# EAGLE board stress_test1 (EAGLE 6.2)
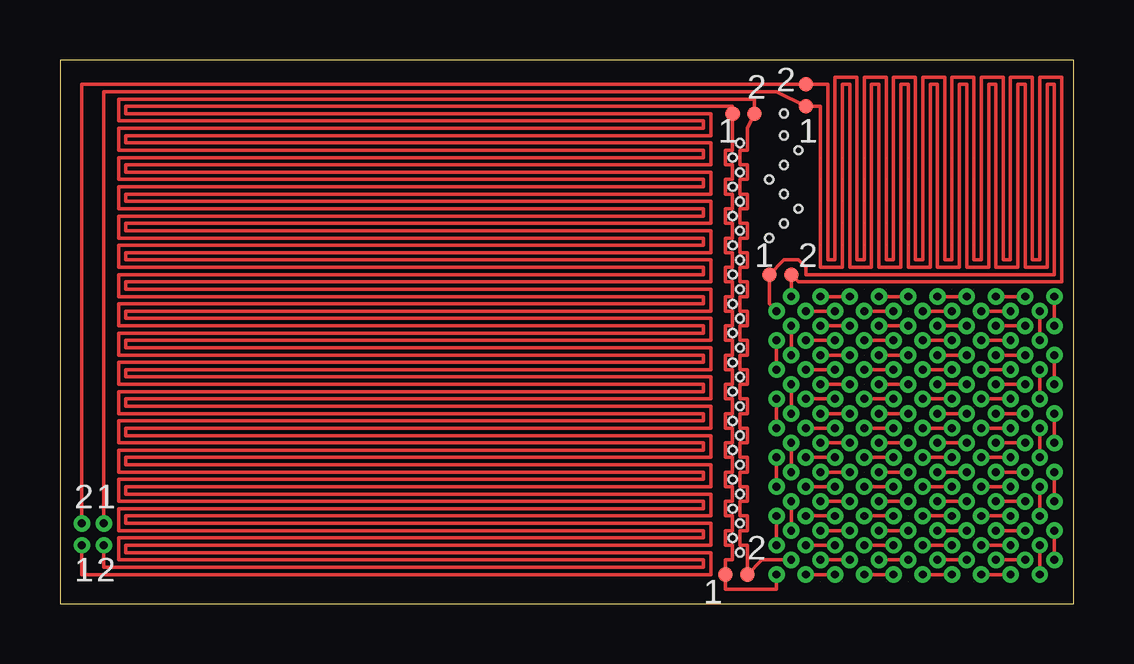
[diagram p0: board, top side]
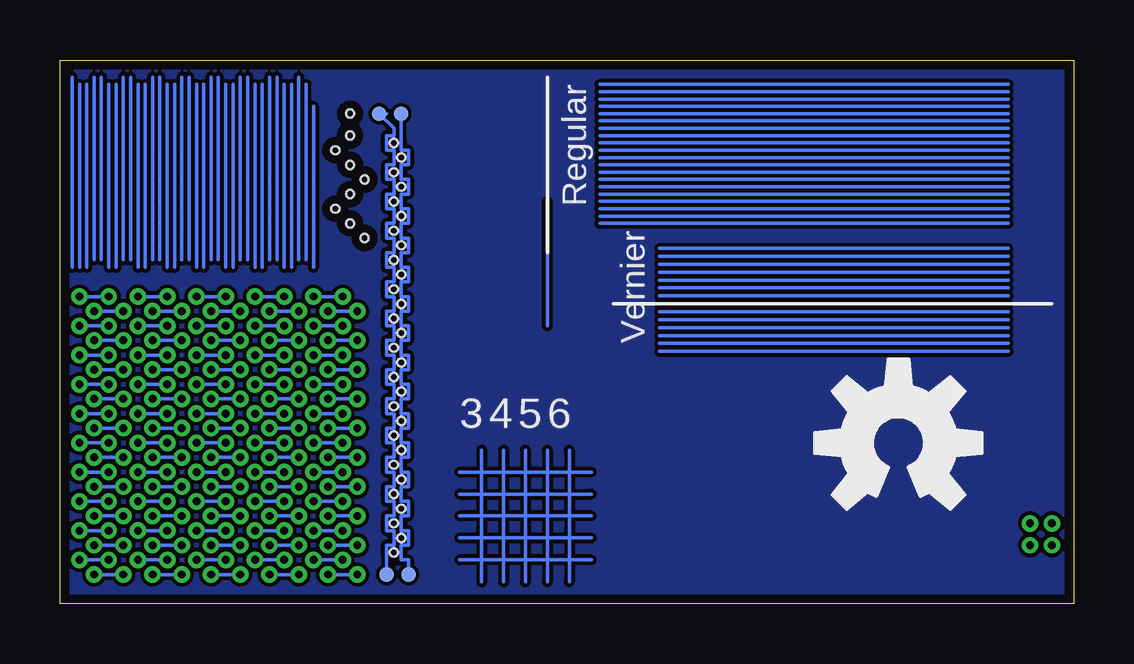
[diagram p1: board, bottom side, seen from below]

Size 42.27 x 22.66 mm. Coordinates in mm from the lower left corner, seen from the top.
Outline: 0,0 42.27,0 42.27,22.66 0,22.66 0,0
Copper layers (1*16): Top 0.0356mm / dielectric 1.5011mm / Bottom 0.0356mm
Design rules: minimum track width 6mil, minimum drill 13mil, track to track 6mil, track to pad 6mil, pad to pad 6mil, via to via 6mil, smd to smd 6mil, copper to edge 15mil, drill to drill 6mil, minimum pad ring 7mil, minimum via ring 7mil, stop-mask expansion 4mil, vias tented up to drill 0mil, thermal gap 10mil
Holes 0.33 mm at 28.04,13.72 28.35,14.33 28.04,14.94 28.35,15.54 28.04,16.15 28.35,16.76 28.04,17.37 28.35,17.98 28.04,18.59 28.35,19.2 28.04,7.62 28.35,8.23 28.04,8.84 28.35,9.45 28.04,10.06 28.35,10.67 28.04,11.28 28.35,11.89 28.04,12.5 28.35,13.11 28.35,2.13 28.04,2.74 28.35,3.35 28.04,3.96 28.35,4.57 28.04,5.18 28.35,5.79 28.04,6.4 28.35,7.01 30.18,20.42 30.18,19.51 30.78,18.9 30.18,18.29 29.57,17.68 30.18,17.07 30.78,16.46 30.18,15.85 29.57,15.24

## Footprints (pad centres in the part's own frame; a part is rotated, then mirrored left to right if it is on the bottom)
TP06R = smd 0.6 x 0.6: TP 0,0

## Placement (x,y rotation side)
E$1  [TP06R]  28.04,20.42 0 top
E$2  [TP06R]  28.96,20.42 0 top
E$3  [TP06R]  27.74,1.22 0 top
E$4  [TP06R]  28.65,1.22 0 top
E$5  [TP06R]  31.09,20.73 0 top
E$6  [TP06R]  31.09,21.64 0 top
E$7  [TP06R]  29.57,13.72 0 top
E$8  [TP06R]  30.48,13.72 0 top
E$11  [TP06R]  0.91,3.35 0 top
E$12  [TP06R]  1.83,3.35 0 top
E$13  [TP06R]  1.83,2.44 0 top
E$14  [TP06R]  0.91,2.44 0 top
E$15  [TP06R]  28.04,20.42 0 bottom
E$16  [TP06R]  28.96,20.42 0 bottom
E$17  [TP06R]  27.74,1.22 0 bottom
E$18  [TP06R]  28.65,1.22 0 bottom
E$19  [OSHW-LOGO-L]  7.32,6.71 0 bottom

## Library data of the parts
E$1-E$8 E$11-E$18 = testpad
E$19 = SparkFun-Aesthetics

## Nets
S$1: E$1.TP E$5.TP E$7.TP
S$2: E$2.TP E$4.TP E$6.TP E$8.TP
S$263: E$15.TP E$17.TP
S$265: E$16.TP E$18.TP

## Tracks (layer width: path | path; a pad name or v marks a point on that pad's centre or on a via)
S$1  (via drill 0.33)
  Top 0.152: v0.91,2.44 0.91,1.22 27.13,1.22 27.13,2.13 2.74,2.13 2.74,2.44 27.13,2.44 27.13,3.35 2.74,3.35 2.74,3.66 27.13,3.66 27.13,4.57 2.74,4.57 2.74,4.88 27.13,4.88 27.13,5.79 2.74,5.79 2.74,6.1 27.13,6.1 27.13,7.01 2.74,7.01 2.74,7.31 27.13,7.31 27.13,8.23 2.74,8.23 2.74,8.53 27.13,8.53 27.13,9.45 2.74,9.45 2.74,9.75 27.13,9.75 27.13,10.67 2.74,10.67 2.74,10.97 27.13,10.97 27.13,11.89 2.74,11.89 2.74,12.19 27.13,12.19 27.13,13.11 2.74,13.11 2.74,13.41 27.13,13.41 27.13,14.33 2.74,14.33 2.74,14.63 27.13,14.63 27.13,15.54 2.74,15.54 2.74,15.85 27.13,15.85 27.13,16.76 2.74,16.76 2.74,17.07 27.13,17.07 27.13,17.98 2.74,17.98 2.74,18.29 27.13,18.29 27.13,19.2 2.74,19.2 2.74,19.51 27.13,19.51 27.13,20.42 2.74,20.42 2.74,20.73 28.04,20.73 E$1.TP 28.04,18.9 27.74,18.9 27.74,18.29 28.04,18.29 28.04,17.68 27.74,17.68 27.74,17.07 28.04,17.07 28.04,16.46 27.74,16.46 27.74,15.85 28.04,15.85 28.04,15.24 27.74,15.24 27.74,14.63 28.04,14.63 28.04,14.02 27.74,14.02 27.74,13.41 28.04,13.41 28.04,12.8 27.74,12.8 27.74,12.19 28.04,12.19 28.04,11.58 27.74,11.58 27.74,10.97 28.04,10.97 28.04,10.36 27.74,10.36 27.74,9.75 28.04,9.75 28.04,9.14 27.74,9.14 27.74,8.53 28.04,8.53 28.04,7.92 27.74,7.92 27.74,7.31 28.04,7.31 28.04,6.71 27.74,6.71 27.74,6.1 28.04,6.1 28.04,5.49 27.74,5.49 27.74,4.88 28.04,4.88 28.04,4.27 27.74,4.27 27.74,3.66 28.04,3.66 28.04,3.05 27.74,3.05 27.74,2.44 28.04,2.44 28.04,1.83 27.74,1.83 27.74,0.61 29.87,0.61 v29.87,1.22 | v31.09,1.22 v32.31,1.22 | v33.53,1.22 v34.75,1.22 | v35.97,1.22 v37.19,1.22
  Top 0.152: v38.4,1.22 v39.62,1.22 | v31.09,2.44 v32.31,2.44 | v33.53,2.44 v34.75,2.44 | v35.97,2.44 v37.19,2.44 | v38.4,2.44 v39.62,2.44 | v40.84,1.22 v40.84,2.44 | v31.09,3.66 v32.31,3.66 | v33.53,3.66 v34.75,3.66 | v35.97,3.66 v37.19,3.66 | v38.4,3.66 v39.62,3.66 | v29.87,2.44 v29.87,3.66 | v31.09,4.88 v32.31,4.88 | v33.53,4.88 v34.75,4.88 | v35.97,4.88 v37.19,4.88 | v38.4,4.88 v39.62,4.88 | v40.84,3.66 v40.84,4.88 | v31.09,6.1 v32.31,6.1 | v33.53,6.1 v34.75,6.1 | v35.97,6.1 v37.19,6.1 | v38.4,6.1 v39.62,6.1 | v31.09,7.31 v32.31,7.31 | v33.53,7.31 v34.75,7.31 | v35.97,7.31 v37.19,7.31 | v38.4,7.31 v39.62,7.31 | v40.84,6.1 v40.84,7.31 | v29.87,4.88 v29.87,6.1 | v31.09,8.53 v32.31,8.53 | v33.53,8.53 v34.75,8.53 | v35.97,8.53 v37.19,8.53 | v38.4,8.53 v39.62,8.53 | v31.09,9.75 v32.31,9.75 | v33.53,9.75 v34.75,9.75 | v35.97,9.75 v37.19,9.75 | v38.4,9.75 v39.62,9.75 | v40.84,8.53 v40.84,9.75 | v29.87,7.31 v29.87,8.53 | v31.09,10.97 v32.31,10.97 | v33.53,10.97 v34.75,10.97 | v35.97,10.97 v37.19,10.97 | v38.4,10.97 v39.62,10.97 | v31.09,12.19 v32.31,12.19 | v33.53,12.19 v34.75,12.19 | v35.97,12.19 v37.19,12.19 | v38.4,12.19 v39.62,12.19 | v40.84,10.97 v40.84,12.19 | v29.87,9.75 v29.87,10.97 | v29.87,12.19 29.57,12.5 E$7.TP 30.17,14.33 30.78,14.33 31.09,14.02 31.09,13.72 41.45,13.72 41.45,21.64 41.15,21.64 41.15,14.02 40.23,14.02 40.23,21.64 39.93,21.64 39.93,14.02 39.01,14.02 39.01,21.64 38.71,21.64 38.71,14.02 37.79,14.02 37.79,21.64 37.49,21.64 37.49,14.02 36.58,14.02 36.58,21.64 36.27,21.64 36.27,14.02 35.36,14.02 35.36,21.64 35.05,21.64 35.05,14.02 34.14,14.02 34.14,21.64 33.83,21.64 33.83,14.02 32.92,14.02 32.92,21.64 32.61,21.64 32.61,14.02 31.7,14.02 31.7,20.73 E$5.TP 29.87,21.34 1.83,21.34 v1.83,3.35
  Bottom 0.152: v29.87,1.22 v31.09,1.22 | v32.31,1.22 v33.53,1.22 | v34.75,1.22 v35.97,1.22 | v37.19,1.22 v38.4,1.22 | v39.62,1.22 v40.84,1.22 | v29.87,2.44 v31.09,2.44 | v32.31,2.44 v33.53,2.44 | v34.75,2.44 v35.97,2.44 | v37.19,2.44 v38.4,2.44 | v39.62,2.44 v40.84,2.44 | v29.87,3.66 v31.09,3.66 | v32.31,3.66 v33.53,3.66 | v34.75,3.66 v35.97,3.66 | v37.19,3.66 v38.4,3.66 | v39.62,3.66 v40.84,3.66 | v29.87,4.88 v31.09,4.88 | v32.31,4.88 v33.53,4.88 | v34.75,4.88 v35.97,4.88 | v37.19,4.88 v38.4,4.88 | v39.62,4.88 v40.84,4.88 | v29.87,6.1 v31.09,6.1 | v32.31,6.1 v33.53,6.1 | v34.75,6.1 v35.97,6.1 | v37.19,6.1 v38.4,6.1 | v39.62,6.1 v40.84,6.1 | v29.87,7.31 v31.09,7.31 | v32.31,7.31 v33.53,7.31 | v34.75,7.31 v35.97,7.31 | v37.19,7.31 v38.4,7.31 | v39.62,7.31 v40.84,7.31 | v29.87,8.53 v31.09,8.53 | v32.31,8.53 v33.53,8.53 | v34.75,8.53 v35.97,8.53 | v37.19,8.53 v38.4,8.53 | v39.62,8.53 v40.84,8.53 | v29.87,9.75 v31.09,9.75 | v32.31,9.75 v33.53,9.75 | v34.75,9.75 v35.97,9.75 | v37.19,9.75 v38.4,9.75 | v39.62,9.75 v40.84,9.75 | v29.87,10.97 v31.09,10.97 | v32.31,10.97 v33.53,10.97 | v34.75,10.97 v35.97,10.97 | v37.19,10.97 v38.4,10.97 | v39.62,10.97 v40.84,10.97 | v29.87,12.19 v31.09,12.19 | v32.31,12.19 v33.53,12.19 | v34.75,12.19 v35.97,12.19 | v37.19,12.19 v38.4,12.19 | v39.62,12.19 v40.84,12.19
S$2  (via drill 0.33)
  Top 0.152: v1.83,2.44 1.83,1.52 26.82,1.52 26.82,1.83 2.44,1.83 2.44,2.74 26.82,2.74 26.82,3.05 2.44,3.05 2.44,3.96 26.82,3.96 26.82,4.27 2.44,4.27 2.44,5.18 26.82,5.18 26.82,5.49 2.44,5.49 2.44,6.4 26.82,6.4 26.82,6.71 2.44,6.71 2.44,7.62 26.82,7.62 26.82,7.92 2.44,7.92 2.44,8.84 26.82,8.84 26.82,9.14 2.44,9.14 2.44,10.06 26.82,10.06 26.82,10.36 2.44,10.36 2.44,11.28 26.82,11.28 26.82,11.58 2.44,11.58 2.44,12.5 26.82,12.5 26.82,12.8 2.44,12.8 2.44,13.72 26.82,13.72 26.82,14.02 2.44,14.02 2.44,14.93 26.82,14.93 26.82,15.24 2.44,15.24 2.44,16.15 26.82,16.15 26.82,16.46 2.44,16.46 2.44,17.37 26.82,17.37 26.82,17.68 2.44,17.68 2.44,18.59 26.82,18.59 26.82,18.9 2.44,18.9 2.44,19.81 26.82,19.81 26.82,20.12 2.44,20.12 2.44,21.03 28.96,21.03 E$2.TP 28.65,19.81 28.65,18.9 28.35,18.9 28.35,18.29 28.65,18.29 28.65,17.68 28.35,17.68 28.35,17.07 28.65,17.07 28.65,16.46 28.35,16.46 28.35,15.85 28.65,15.85 28.65,15.24 28.35,15.24 28.35,14.63 28.65,14.63 28.65,14.02 28.35,14.02 28.35,13.41 28.65,13.41 28.65,12.8 28.35,12.8 28.35,12.19 28.65,12.19 28.65,11.58 28.35,11.58 28.35,10.97 28.65,10.97 28.65,10.36 28.35,10.36 28.35,9.75 28.65,9.75 28.65,9.14 28.35,9.14 28.35,8.53 28.65,8.53 28.65,7.92 28.35,7.92 28.35,7.31 28.65,7.31 28.65,6.71 28.35,6.71 28.35,6.1 28.65,6.1 28.65,5.49 28.35,5.49 28.35,4.88 28.65,4.88 28.65,4.27 28.35,4.27 28.35,3.66 28.65,3.66 28.65,3.05 28.35,3.05 28.35,2.44 28.65,2.44 E$4.TP 29.26,1.83 v30.48,1.83 | v31.7,1.83 v32.92,1.83 | v34.14,1.83 v35.36,1.83 | v36.58,1.83 v37.79,1.83 | v39.01,1.83 v40.23,1.83
  Top 0.152: v31.7,3.05 v32.92,3.05 | v34.14,3.05 v35.36,3.05 | v36.58,3.05 v37.79,3.05 | v39.01,3.05 v40.23,3.05 | v41.45,1.83 v41.45,3.05 | v31.7,4.27 v32.92,4.27 | v34.14,4.27 v35.36,4.27 | v36.58,4.27 v37.79,4.27 | v39.01,4.27 v40.23,4.27 | v30.48,3.05 v30.48,4.27 | v31.7,5.49 v32.92,5.49 | v34.14,5.49 v35.36,5.49 | v36.58,5.49 v37.79,5.49 | v39.01,5.49 v40.23,5.49 | v31.7,6.71 v32.92,6.71 | v34.14,6.71 v35.36,6.71 | v36.58,6.71 v37.79,6.71 | v39.01,6.71 v40.23,6.71 | v30.48,5.49 v30.48,6.71 | v41.45,4.27 v41.45,5.49 | v31.7,7.92 v32.92,7.92 | v34.14,7.92 v35.36,7.92 | v36.58,7.92 v37.79,7.92 | v39.01,7.92 v40.23,7.92 | v31.7,9.14 v32.92,9.14 | v34.14,9.14 v35.36,9.14 | v36.58,9.14 v37.79,9.14 | v39.01,9.14 v40.23,9.14 | v30.48,7.92 v30.48,9.14 | v41.45,6.71 v41.45,7.92 | v31.7,10.36 v32.92,10.36 | v34.14,10.36 v35.36,10.36 | v36.58,10.36 v37.79,10.36 | v39.01,10.36 v40.23,10.36 | v31.7,11.58 v32.92,11.58 | v34.14,11.58 v35.36,11.58 | v36.58,11.58 v37.79,11.58 | v39.01,11.58 v40.23,11.58 | v30.48,10.36 v30.48,11.58 | v41.45,9.14 v41.45,10.36 | v31.7,12.8 v32.92,12.8 | v34.14,12.8 v35.36,12.8 | v36.58,12.8 v37.79,12.8 | v39.01,12.8 v40.23,12.8 | v41.45,11.58 v41.45,12.8 | v30.48,12.8 E$8.TP 30.78,13.41 41.76,13.41 41.76,21.95 40.84,21.95 40.84,14.33 40.54,14.33 40.54,21.95 39.62,21.95 39.62,14.33 39.32,14.33 39.32,21.95 38.4,21.95 38.4,14.33 38.1,14.33 38.1,21.95 37.19,21.95 37.19,14.33 36.88,14.33 36.88,21.95 35.97,21.95 35.97,14.33 35.66,14.33 35.66,21.95 34.75,21.95 34.75,14.33 34.44,14.33 34.44,21.95 33.53,21.95 33.53,14.33 33.22,14.33 33.22,21.95 32.31,21.95 32.31,14.33 32,14.33 32,21.64 E$6.TP 0.91,21.64 v0.91,3.35
  Bottom 0.152: v30.48,1.83 v31.7,1.83 | v32.92,1.83 v34.14,1.83 | v35.36,1.83 v36.58,1.83 | v37.79,1.83 v39.01,1.83 | v40.23,1.83 v41.45,1.83 | v30.48,3.05 v31.7,3.05 | v32.92,3.05 v34.14,3.05 | v35.36,3.05 v36.58,3.05 | v37.79,3.05 v39.01,3.05 | v40.23,3.05 v41.45,3.05 | v30.48,4.27 v31.7,4.27 | v32.92,4.27 v34.14,4.27 | v35.36,4.27 v36.58,4.27 | v37.79,4.27 v39.01,4.27 | v40.23,4.27 v41.45,4.27 | v30.48,5.49 v31.7,5.49 | v32.92,5.49 v34.14,5.49 | v35.36,5.49 v36.58,5.49 | v37.79,5.49 v39.01,5.49 | v40.23,5.49 v41.45,5.49 | v30.48,6.71 v31.7,6.71 | v32.92,6.71 v34.14,6.71 | v35.36,6.71 v36.58,6.71 | v37.79,6.71 v39.01,6.71 | v40.23,6.71 v41.45,6.71 | v30.48,7.92 v31.7,7.92 | v32.92,7.92 v34.14,7.92 | v35.36,7.92 v36.58,7.92 | v37.79,7.92 v39.01,7.92 | v40.23,7.92 v41.45,7.92 | v30.48,9.14 v31.7,9.14 | v32.92,9.14 v34.14,9.14 | v35.36,9.14 v36.58,9.14 | v37.79,9.14 v39.01,9.14 | v40.23,9.14 v41.45,9.14 | v30.48,10.36 v31.7,10.36 | v32.92,10.36 v34.14,10.36 | v35.36,10.36 v36.58,10.36 | v37.79,10.36 v39.01,10.36 | v40.23,10.36 v41.45,10.36 | v30.48,11.58 v31.7,11.58 | v32.92,11.58 v34.14,11.58 | v35.36,11.58 v36.58,11.58 | v37.79,11.58 v39.01,11.58 | v40.23,11.58 v41.45,11.58 | v30.48,12.8 v31.7,12.8 | v32.92,12.8 v34.14,12.8 | v35.36,12.8 v36.58,12.8 | v37.79,12.8 v39.01,12.8 | v40.23,12.8 v41.45,12.8
S$30
  Bottom 0.152: 41.76,14.02 41.76,21.95
S$36
  Bottom 0.152: 41.45,21.64 41.45,14.02
S$37
  Bottom 0.152: 41.15,14.02 41.15,21.64
S$38
  Bottom 0.152: 40.84,21.95 40.84,14.33
S$39
  Bottom 0.152: 40.54,14.33 40.54,21.95
S$40
  Bottom 0.152: 40.23,21.64 40.23,14.02
S$41
  Bottom 0.152: 39.93,14.02 39.93,21.64
S$42
  Bottom 0.152: 39.62,21.95 39.62,14.33
S$43
  Bottom 0.152: 39.32,14.33 39.32,21.95
S$44
  Bottom 0.152: 38.4,21.95 38.4,14.33
S$45
  Bottom 0.152: 38.71,14.02 38.71,21.64
S$46
  Bottom 0.152: 39.01,21.64 39.01,14.02
S$47
  Bottom 0.152: 38.1,14.33 38.1,21.95
S$48
  Bottom 0.152: 37.79,21.64 37.79,14.02
S$49
  Bottom 0.152: 37.49,14.02 37.49,21.64
S$50
  Bottom 0.152: 37.19,21.95 37.19,14.33
S$51
  Bottom 0.152: 36.88,14.33 36.88,21.95
S$52
  Bottom 0.152: 36.58,21.64 36.58,14.02
S$53
  Bottom 0.152: 36.27,14.02 36.27,21.64
S$54
  Bottom 0.152: 35.97,21.95 35.97,14.33
S$55
  Bottom 0.152: 35.66,14.33 35.66,21.95
S$56
  Bottom 0.152: 35.36,21.64 35.36,14.02
S$57
  Bottom 0.152: 35.05,14.02 35.05,21.64
S$58
  Bottom 0.152: 34.75,21.95 34.75,14.33
S$59
  Bottom 0.152: 34.44,14.33 34.44,21.95
S$60
  Bottom 0.152: 34.14,21.64 34.14,14.02
S$61
  Bottom 0.152: 33.83,14.02 33.83,21.64
S$62
  Bottom 0.152: 33.53,21.95 33.53,14.33
S$63
  Bottom 0.152: 33.22,14.33 33.22,21.95
S$64
  Bottom 0.152: 32.92,21.64 32.92,14.02
S$65
  Bottom 0.152: 32.61,14.02 32.61,21.64
S$66
  Bottom 0.152: 32.31,21.95 32.31,14.33
S$67
  Bottom 0.152: 32,14.33 32,21.64
S$68
  Bottom 0.152: 31.7,20.73 31.7,14.02
S$134
  Bottom 0.152: 21.95,11.58 21.95,16.76
S$135  (1 unrouted)
S$136  (1 unrouted)
S$137  (1 unrouted)
S$138  (1 unrouted)
S$139  (1 unrouted)
S$140  (1 unrouted)
S$141  (1 unrouted)
S$142  (1 unrouted)
S$143  (1 unrouted)
S$144  (1 unrouted)
S$145  (1 unrouted)
S$146  (1 unrouted)
S$147  (1 unrouted)
S$148  (1 unrouted)
S$149  (1 unrouted)
S$150  (1 unrouted)
S$151  (1 unrouted)
S$152  (1 unrouted)
S$153
  Bottom 0.152: 21.03,6.4 21.03,0.91
S$154  (1 unrouted)
S$234
  Bottom 0.152: 21.95,6.4 21.95,0.91
S$235  (1 unrouted)
S$236  (1 unrouted)
S$237  (1 unrouted)
S$238  (1 unrouted)
S$239  (1 unrouted)
S$240  (1 unrouted)
S$241  (1 unrouted)
S$242  (1 unrouted)
S$243  (1 unrouted)
S$244  (1 unrouted)
S$245  (1 unrouted)
S$246  (1 unrouted)
S$247  (1 unrouted)
S$248  (1 unrouted)
S$249  (1 unrouted)
S$250  (1 unrouted)
S$251  (1 unrouted)
S$252
  Bottom 0.152: 22.86,6.4 22.86,0.91
S$253  (1 unrouted)
S$254
  Bottom 0.152: 23.77,6.4 23.77,0.91
S$255
  Bottom 0.152: 24.69,6.4 24.69,0.91
S$256
  Bottom 0.152: 20.12,5.49 25.6,5.49
S$257
  Bottom 0.152: 25.6,4.57 20.12,4.57
S$258
  Bottom 0.152: 20.12,3.66 25.6,3.66
S$259
  Bottom 0.152: 25.6,2.74 20.12,2.74
S$260
  Bottom 0.152: 20.12,1.83 25.6,1.83
S$261
  Bottom 0.152: 2.74,21.64 19.76,21.64
S$262
  Bottom 0.152: 19.76,21.34 2.74,21.34
S$263
  Bottom 0.152: E$15.TP 28.04,18.9 27.74,18.9 27.74,18.29 28.04,18.29 28.04,17.68 27.74,17.68 27.74,17.07 28.04,17.07 28.04,16.46 27.74,16.46 27.74,15.85 28.04,15.85 28.04,15.24 27.74,15.24 27.74,14.63 28.04,14.63 28.04,14.02 27.74,14.02 27.74,13.41 28.04,13.41 28.04,12.8 27.74,12.8 27.74,12.19 28.04,12.19 28.04,11.58 27.74,11.58 27.74,10.97 28.04,10.97 28.04,10.36 27.74,10.36 27.74,9.75 28.04,9.75 28.04,9.14 27.74,9.14 27.74,8.53 28.04,8.53 28.04,7.92 27.74,7.92 27.74,7.31 28.04,7.31 28.04,6.71 27.74,6.71 27.74,6.1 28.04,6.1 28.04,5.49 27.74,5.49 27.74,4.88 28.04,4.88 28.04,4.27 27.74,4.27 27.74,3.66 28.04,3.66 28.04,3.05 27.74,3.05 27.74,2.44 28.04,2.44 28.04,1.83 27.74,1.83 E$17.TP
S$264
  Bottom 0.152: 2.74,21.03 19.76,21.03
S$265
  Bottom 0.152: E$18.TP 28.65,2.44 28.35,2.44 28.35,3.05 28.65,3.05 28.65,3.66 28.35,3.66 28.35,4.27 28.65,4.27 28.65,4.88 28.35,4.88 28.35,5.49 28.65,5.49 28.65,6.1 28.35,6.1 28.35,6.71 28.65,6.71 28.65,7.31 28.35,7.31 28.35,7.92 28.65,7.92 28.65,8.53 28.35,8.53 28.35,9.14 28.65,9.14 28.65,9.75 28.35,9.75 28.35,10.36 28.65,10.36 28.65,10.97 28.35,10.97 28.35,11.58 28.65,11.58 28.65,12.19 28.35,12.19 28.35,12.8 28.65,12.8 28.65,13.41 28.35,13.41 28.35,14.02 28.65,14.02 28.65,14.63 28.35,14.63 28.35,15.24 28.65,15.24 28.65,15.85 28.35,15.85 28.35,16.46 28.65,16.46 28.65,17.07 28.35,17.07 28.35,17.68 28.65,17.68 28.65,18.29 28.35,18.29 28.35,18.9 28.65,18.9 28.65,19.51 28.35,19.51 28.35,19.81 E$16.TP 28.65,20.42
S$266
  Bottom 0.152: 2.74,20.73 19.76,20.73
S$267
  Bottom 0.152: 19.76,20.42 2.74,20.42
S$268
  Bottom 0.152: 2.74,20.12 19.76,20.12
S$269
  Bottom 0.152: 19.76,19.81 2.74,19.81
S$270
  Bottom 0.152: 2.74,19.51 19.76,19.51
S$271
  Bottom 0.152: 19.76,19.2 2.74,19.2
S$272
  Bottom 0.152: 2.74,18.9 19.76,18.9
S$273
  Bottom 0.152: 19.76,18.59 2.74,18.59
S$274
  Bottom 0.152: 2.74,18.29 19.76,18.29
S$275
  Bottom 0.152: 19.76,17.98 2.74,17.98
S$276
  Bottom 0.152: 2.74,17.68 19.76,17.68
S$277
  Bottom 0.152: 19.76,17.37 2.74,17.37
S$278
  Bottom 0.152: 2.74,17.07 19.76,17.07
S$279
  Bottom 0.152: 19.76,16.76 2.74,16.76
S$280
  Bottom 0.152: 2.74,16.46 19.76,16.46
S$281
  Bottom 0.152: 19.76,16.15 2.74,16.15
S$282
  Bottom 0.152: 2.74,15.85 19.76,15.85
S$283
  Bottom 0.152: 2.74,12.5 17.27,12.5
S$284
  Bottom 0.152: 17.27,12.83 2.74,12.83
S$285
  Bottom 0.152: 2.74,13.16 17.27,13.16
S$286
  Bottom 0.152: 2.74,13.49 17.27,13.49
S$287
  Bottom 0.152: 2.74,13.82 17.27,13.82
S$288
  Bottom 0.152: 17.27,14.15 2.74,14.15
S$289
  Bottom 0.152: 2.74,14.48 17.27,14.48
S$290
  Bottom 0.152: 17.27,14.81 2.74,14.81
S$291
  Bottom 0.152: 2.74,12.17 17.27,12.17
S$292
  Bottom 0.152: 17.27,11.84 2.74,11.84
S$293
  Bottom 0.152: 2.74,11.51 17.27,11.51
S$294
  Bottom 0.152: 17.27,11.18 2.74,11.18
S$295
  Bottom 0.152: 2.74,10.85 17.27,10.85
S$296
  Bottom 0.152: 17.27,10.52 2.74,10.52
S$336
  pour Bottom: 0.3,22.25 42.37,22.25 42.37,0.3 0.3,0.3
S$339  (1 unrouted)
S$340  (1 unrouted)
S$341  (1 unrouted)
S$342  (1 unrouted)
S$343  (1 unrouted)
S$344  (1 unrouted)
S$345  (1 unrouted)
S$346  (1 unrouted)
S$347  (1 unrouted)
S$348  (1 unrouted)
S$349  (1 unrouted)
S$350  (1 unrouted)
S$351  (1 unrouted)
S$352  (1 unrouted)
S$353  (1 unrouted)
S$354  (1 unrouted)
S$355  (1 unrouted)
S$356  (1 unrouted)
S$357  (1 unrouted)
S$358  (1 unrouted)
S$359  (1 unrouted)
S$360  (1 unrouted)
S$361  (1 unrouted)
S$362  (1 unrouted)
S$363  (1 unrouted)
S$364  (1 unrouted)
S$365  (1 unrouted)
S$366  (1 unrouted)
S$367  (1 unrouted)
S$368  (1 unrouted)
S$369  (1 unrouted)
S$370  (1 unrouted)
S$371  (1 unrouted)
S$372  (1 unrouted)
S$373  (1 unrouted)
S$374  (1 unrouted)
S$375  (1 unrouted)
S$376  (1 unrouted)
S$377  (1 unrouted)
S$378  (1 unrouted)
S$379  (1 unrouted)
S$380  (1 unrouted)
S$381  (1 unrouted)
S$382  (1 unrouted)
S$383  (1 unrouted)
S$384  (1 unrouted)
S$385  (1 unrouted)
S$386  (1 unrouted)
S$387  (1 unrouted)
S$388  (1 unrouted)
S$389  (1 unrouted)
S$390  (1 unrouted)
S$391  (1 unrouted)
S$392  (1 unrouted)
S$393  (1 unrouted)
S$394  (1 unrouted)
S$395  (1 unrouted)
S$396  (1 unrouted)
S$397  (1 unrouted)
S$398  (1 unrouted)
S$399  (1 unrouted)
S$400  (1 unrouted)
S$401  (1 unrouted)
S$402  (1 unrouted)
S$403  (1 unrouted)
S$404  (1 unrouted)
S$405  (1 unrouted)
S$406  (1 unrouted)
S$407  (1 unrouted)
S$408  (1 unrouted)
S$409  (1 unrouted)
S$410  (1 unrouted)
S$411  (1 unrouted)
S$412  (1 unrouted)
S$413  (1 unrouted)
S$414  (1 unrouted)
S$415  (1 unrouted)
S$416  (1 unrouted)
S$417  (1 unrouted)
S$418  (1 unrouted)
S$419  (1 unrouted)
S$420  (1 unrouted)
S$421  (1 unrouted)
S$422  (1 unrouted)
S$423  (1 unrouted)
S$424  (1 unrouted)
S$425  (1 unrouted)
S$426  (1 unrouted)
S$427  (1 unrouted)
S$428  (1 unrouted)
S$429  (1 unrouted)
S$430  (1 unrouted)
S$431  (1 unrouted)
S$432  (1 unrouted)
S$433  (1 unrouted)
S$434  (1 unrouted)
S$435  (1 unrouted)
S$436  (1 unrouted)
S$437  (1 unrouted)
S$438  (1 unrouted)
S$439  (1 unrouted)
S$440  (1 unrouted)
S$441  (1 unrouted)

## Text on the board
tPlace: 2 | 2 | 1 | 1 | 1 | 2 | 2 | 1 | 2 | 1 | 2 | 1
bPlace: Regular | Vernier | 6 | 5 | 4 | 3
bStop: 6/6/13/7 | Woodpeckers | v2012-07-12 | A Very Bad Board